# Altium PCB 8266WROOM.PcbDoc
Units mil, origin at the board's own origin, x right, y up, seen from the top; angles counter-clockwise.
Board outline 1653.54 x 3937.01 mil, 2 copper layers (Top Layer, Bottom Layer), stack 10.477 mil thick; 64 components, 32 nets, 296 pads, 36 vias.
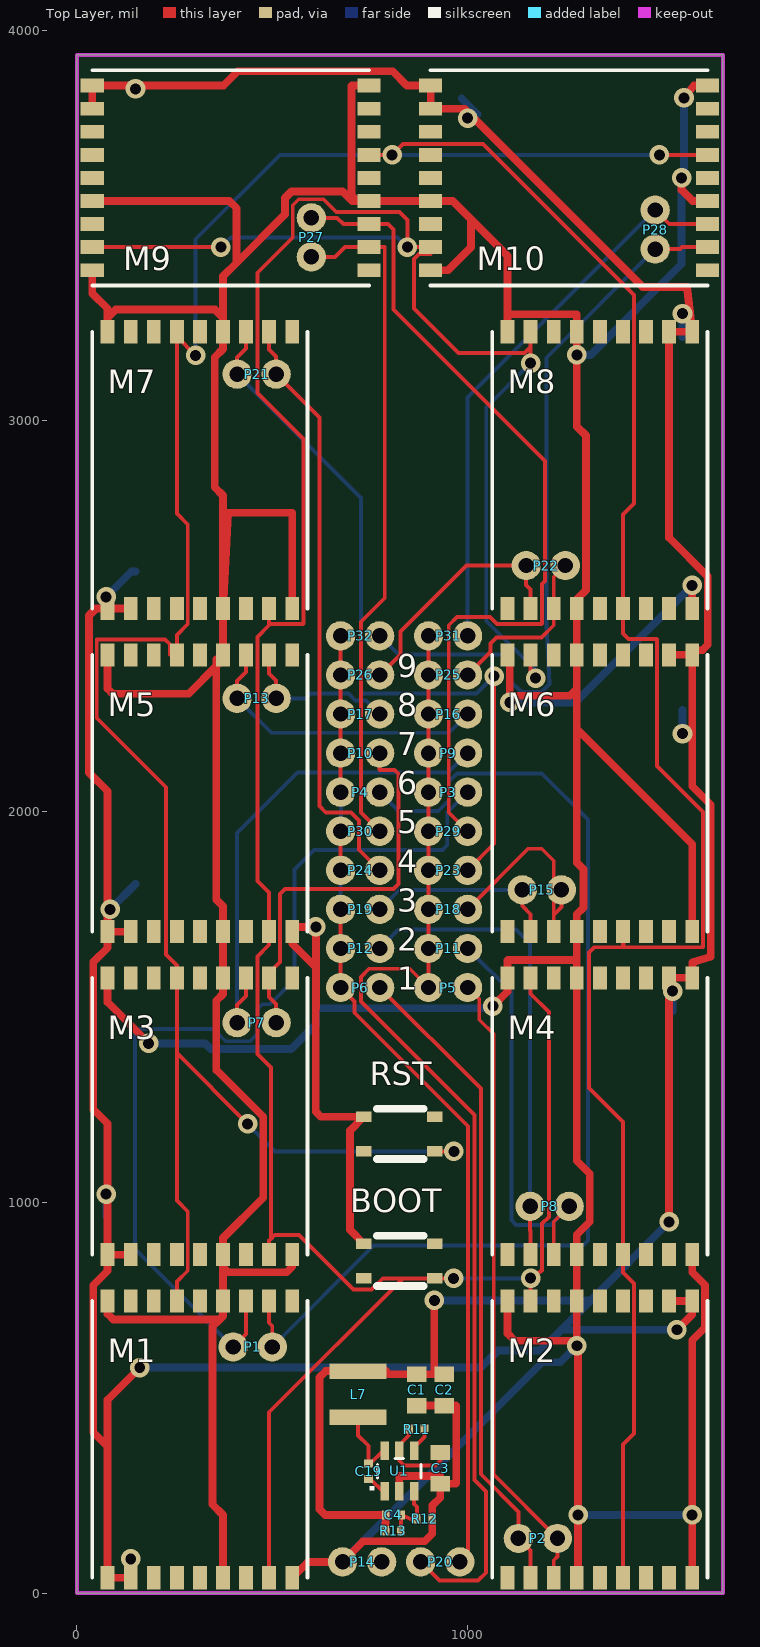
[diagram p0: Top Layer view]
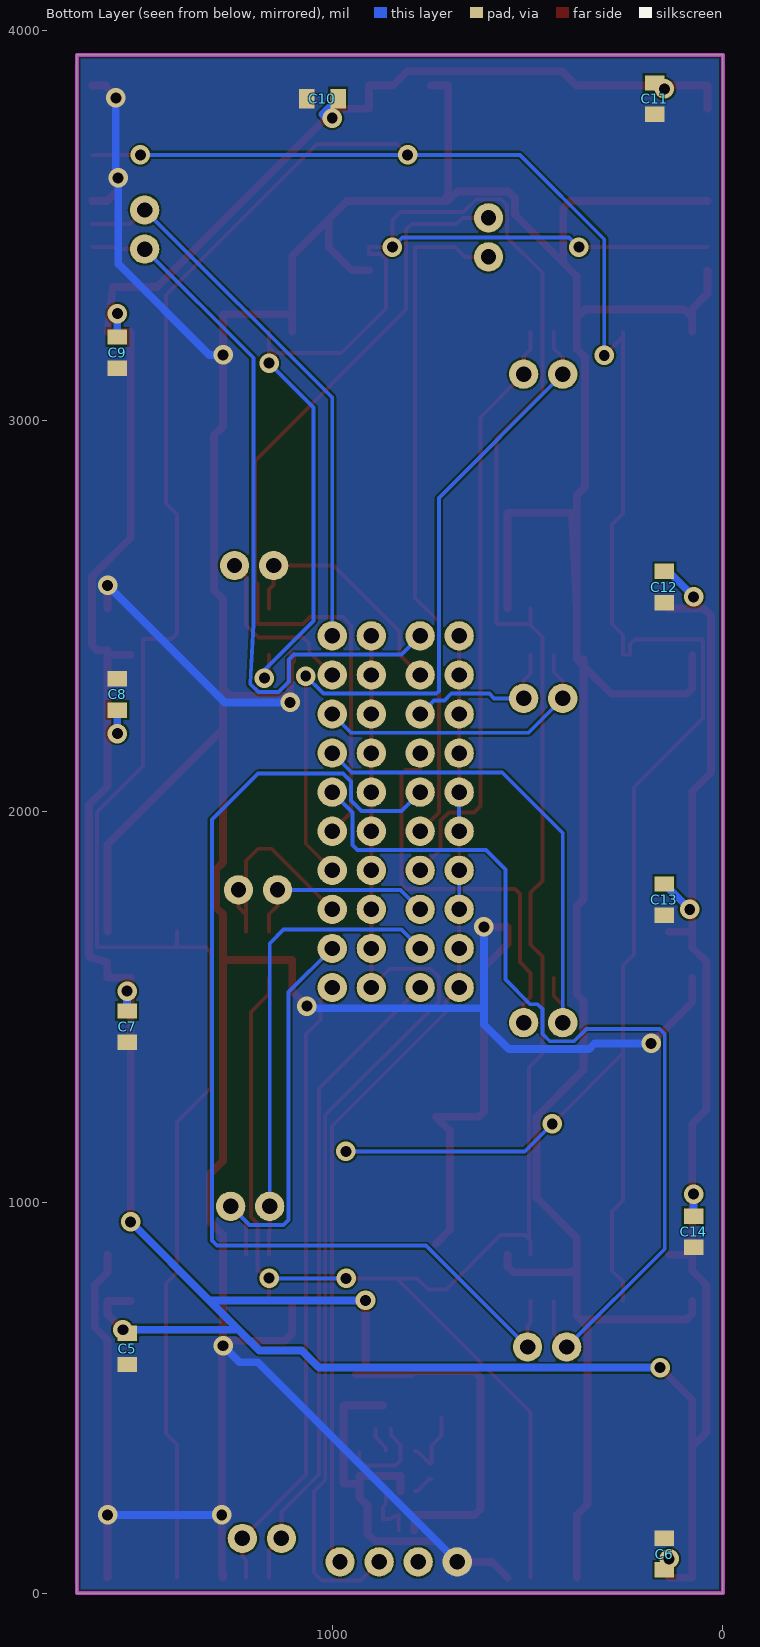
[diagram p1: Bottom Layer view, seen from below]

## Layer stack, top to bottom
Top Solder: solder mask 0.4, Solder Resist, Dk 3.5
Top Layer: signal copper 1.4
Dielectric1: core 7.6772, FR-4, Dk 4.2
Bottom Layer: signal copper 1.4
Bottom Solder: solder mask 0.4, Solder Resist, Dk 3.5

## Board outline
0,0 1653.54,0 1653.54,3937.01 0,3937.01

## Design rules (kind name [scope] priority, off if disabled: settings)
Clearance Clearance_1 [InNetClass('50R') vs InPolygon] p1: gap=20
Clearance [All] p2: gap=5
DiffPairsRouting [All] p1: maxlimit=10 minlimit=6 mostfreqgap=6 toplayer_minwidth=6 toplayer_maxwidth=15 toplayer_prefwidth=6 bottomlayer_minwidth=6 bottomlayer_maxwidth=15 bottomlayer_prefwidth=6 maxuncoupledlength=500
MinimumSolderMaskSliver [All] p1 off: minsoldermaskwidth=10
PlaneClearance [All] p1: clearance=6
PlaneConnect [All] p1: planeconnectstyle=Direct reliefexpansion=20 reliefentries=4 reliefconductorwidth=10 reliefairgap=10
PolygonConnect [All] p1: connectstyle=Direct reliefconductorwidth=10 reliefentries=4 polygonreliefangle="90 Angle" airgapwidth=10
RoomDefinition 8266WROOM [InComponentClass('8266WROOM')] p1 off: confinementstyle=ConfineIn formatcopy=TRUE lockcomponents=FALSE outline 1996.85,62.1 8636.85,62.1 8636.85,962.1 1996.85,962.1
RoomDefinition power [InComponentClass('power')] p2 off: confinementstyle=ConfineIn formatcopy=TRUE lockcomponents=FALSE outline 1313.85,-244.9 4703.85,-244.9 4703.85,-66.9 1313.85,-66.9
RoutingVias [All] p1: holewidth=28 width=50 viastyle="Through Hole" minholewidth=12 minwidth=20 maxholewidth=28 maxwidth=50
SilkToSilkClearance [All] p1 off: silktosilkclearance=10
SilkToSolderMaskClearance [IsPad] p1 off: minsilkscreentomaskgap=10 clearancetoexposedcopper=TRUE
SolderMaskExpansion [All] p1 off: expansion=4
UnpouredPolygon [All] p1: allowunpoured=FALSE
Width Width_1 [InNet('3.3') or InNet('GND')] p1: maxlimit=20 minlimit=20 preferedwidth=20
Width [All] p2: maxlimit=100 minlimit=6 preferedwidth=10
23 further rules are at their usual default settings.

## Classes and differential pairs
component class 8266WROOM: BOOT M1 M2 M3 M4 M5 M6 M7 M8 M9 M10 P1 P2 P3 P4 P5 P6 P7 P8 P9 P10 P11 P12 P13 P14 P15 P16 P17 P18 P19 P20 P21 P22 P23 P24 P25 P26 P27 P28 P29 P30 P31 P32 RST
component class power: C1 C2 C3 C4 C5 C6 C7 C8 C9 C10 C11 C12 C13 C14 C19 L7 R11 R12 R13 U1

## Components (designator, comment, footprint, x,y, rotation, side; value= is the part's Value field where it differs from the comment)
BOOT "SW-PB" SW3x4 825,850 r180 top
C1 "Cap" 0805 870,520 r90 top
C2 "Cap" 0805 940,520 r90 top
C3 "Cap" 0805 930,320 r90 top
C4 "Cap" 0402 810,200 r0 top
C5 "Cap" 0805 1525,625 r90 bottom
C6 "Cap" 0805 150,100 r270 bottom
C7 "Cap" 0805 1525,1450 r90 bottom
C8 "Cap" 0805 1550,2300 r270 bottom
C9 "Cap" 0805 1550,3175 r90 bottom
C10 "Cap" 0805 1025,3825 r180 bottom
C11 "Cap" 0805 175,3825 r90 bottom
C12 "Cap" 0805 150,2575 r90 bottom
C13 "Cap" 0805 150,1775 r90 bottom
C14 "Cap" 0805 75,925 r90 bottom
C19 "0.1uF" 0402 746.38,312.2 r270 top
L7 "4.7uH" L4015 720,450 r90 top
M1 "ESP8266_WROOM02" ESP8266-WROOM-02 314.96,393.7 r90 top
M2 "ESP8266_WROOM02" ESP8266-WROOM-02 1338.58,393.7 r270 top
M3 "ESP8266_WROOM02" ESP8266-WROOM-02 314.96,1220.47 r90 top
M4 "ESP8266_WROOM02" ESP8266-WROOM-02 1338.58,1220.47 r270 top
M5 "ESP8266_WROOM02" ESP8266-WROOM-02 314.96,2047.24 r90 top
M6 "ESP8266_WROOM02" ESP8266-WROOM-02 1338.58,2047.24 r270 top
M7 "ESP8266_WROOM02" ESP8266-WROOM-02 314.96,2874.02 r90 top
M8 "ESP8266_WROOM02" ESP8266-WROOM-02 1338.58,2874.02 r270 top
M9 "ESP8266_WROOM02" ESP8266-WROOM-02 393.7,3622.05 r0 top
M10 "ESP8266_WROOM02" ESP8266-WROOM-02 1259.84,3622.05 r0 top
P1 "2P" 2P 400,630 r0 top
P2 "2P" 2P 1230,140 r180 top
P3 "2P" 2P 900,2050 r0 top
P4 "2P" 2P 675,2050 r0 top
P5 "2P" 2P 900,1550 r0 top
P6 "2P" 2P 675,1550 r0 top
P7 "2P" 2P 410,1460 r0 top
P8 "2P" 2P 1260,990 r180 top
P9 "2P" 2P 900,2150 r0 top
P10 "2P" 2P 675,2150 r0 top
P11 "2P" 2P 900,1650 r0 top
P12 "2P" 2P 675,1650 r0 top
P13 "2P" 2P 410,2290 r0 top
P14 "2P" 2P 680,80 r0 top
P15 "2P" 2P 1240,1800 r180 top
P16 "2P" 2P 900,2250 r0 top
P17 "2P" 2P 675,2250 r0 top
P18 "2P" 2P 900,1750 r0 top
P19 "2P" 2P 675,1750 r0 top
P20 "2P" 2P 980,80 r180 top
P21 "2P" 2P 410,3120 r0 top
P22 "2P" 2P 1250,2630 r180 top
P23 "2P" 2P 900,1850 r0 top
P24 "2P" 2P 675,1850 r0 top
P25 "2P" 2P 900,2350 r0 top
P26 "2P" 2P 675,2350 r0 top
P27 "2P" 2P 600,3520 r270 top
P28 "2P" 2P 1480,3540 r270 top
P29 "2P" 2P 900,1950 r0 top
P30 "2P" 2P 675,1950 r0 top
P31 "2P" 2P 900,2450 r0 top
P32 "2P" 2P 675,2450 r0 top
R11 "10k" 0402 870,420 r180 top
R12 "10k" 0402 890,190 r180 top
R13 "45k" 0402 810,160 r180 top
RST "SW-PB" SW3x4 825,1175 r180 top
U1 "RT7295A" SOT23-6 825.12,312.2 r0 top

## Footprints (in the part's own frame and the unit in brackets; to place one, negate y for a bottom-side part, rotate by r counter-clockwise, add the part's x,y. Pads: shape width x height; smd on the part's side, far side on the other; paste and mask are expansions set on the pad)
2P [mm]
  round 1.905 hole 1: 1(0,0) 2(2.54,0)
0402 [mil] "0402-RES"
  rect 20x24 smd: 1(-19.69,0) 2(20,0)
0805 [mil]
  rect 39.37x50 smd: 1(-40,0) 2(40,0)
  body extent -50,-30 50,30, height 31
ESP8266-WROOM-02 [mm]
  rect 1.5x0.9 smd: 1(-9,6) 2(-9,4.5) 3(-9,3) 4(-9,1.5) 5(-9,0) 6(-9,-1.5) 7(-9,-3) 8(-9,-4.5) 9(-9,-6) 10(9,-6) 11(9,-4.5) 12(9,-3) 13(9,-1.5) 14(9,0) 15(9,1.5) 16(9,3) 17(9,4.5) 18(9,6)
  silkscreen extent -9,-7 9,7
L4015 [mm]
  rect 1x3.7 smd: 1(0,0) 2(3,0)
SOT23-6 [mil] "SOT23-5"
  rect 22x48 smd: 1(-37.4,-51.18) 2(0,-51.18) 3(38,-51.18) 4(38,52) 5(0,52.01) 6(-37.4,52)
  silkscreen extent -76,-50 56,32
SW3x4 [mm]
  rect 1x0.7 smd: 1(-2.3,1.125) 2(2.3,-1.125) 3(2.3,1.125) 4(-2.3,-1.125)
  silkscreen extent -1.58,-1.65 1.45,1.62, body extent -2,-1.5 2,1.5, height 2.6

## Part data
BOOT RST: "Switch"
C1 C2 C3 C4 C5 C6 C7 C8 C9 C10 C11 C12 C13 C14: "Capacitor"
C19: library part Cap, "Capacitor"
L7: library part Inductor, "Inductor"
R11 R12 R13: library part Res2, "Resistor"

## Via types
v1: diameter 50, hole 28, Top Layer to Bottom Layer, 36 vias

## Nets (pads, with @x,y where several pads share a name; then routed paths per layer and width w, separated by ;. In a path a pad name is that pad's centre, name@x,y a point inside that pad or via, vN(x,y) a via of type N, cw(c..) or ccw(c..) an arc to the next point about the centre after c; other vN are vias at no path point)
3.3: C1.2 C2.2 C4.1 C5.2 C6.2 C7.2 C8.2 C9.2 C10.2 C11.2 C12.2 C13.2 C14.2 L7.2 M1.1 M1.2 M2.1 M2.2 M3.1 M3.2 M4.1 M4.2 M5.1 M5.2 M6.1 M6.2 M7.1 M7.2 M8.1 M8.2 M9.1 M9.2 M10.1 M10.2 R13.2 | length 11685.9
  Top Layer w20: M9.2 M9.1 375.02,3858.27 411.85,3895.1 808.02,3895.1 844.85,3858.27 M10.1 M10.2 992.24,3799.21 1448.35,3343.1 1561.85,3343.1 1569.29,3277.18 M8.1 M8.2 1515.75,2701.2 1614.85,2602.1 1614.85,2427.1 1600.85,2413.1 1574.8,2413.1 M6.1 ; v1(137.79,87.79) M1.2 M1.1 78.74,375.1 ; M3.2 M3.1 ; M5.2 M5.1 ; M7.2 M7.1 78.74,2520.1 48.85,2520.1 30.85,2502.1 30.85,2099.99 78.74,2052.1 M5.1 ; v1(160.85,577.1) 78.74,494.99 78.74,375.1 ; R13.2 790,179.1 790.31,179.42 C4.1 635.45,200 620.85,214.6 620.85,552.11 636.85,568.11 L7.2 790.85,568.11 798.96,560 C1.2 914.85,560 ; v1(914.85,749.1) 914.85,560 ; C2.2 914.85,560 ; M2.2 M2.1 1574.8,713.1 v1(1535.8,674.1) ; M6.2 M6.1 ; v1(1515.85,950.1) 1515.75,950.2 M4.2 M4.1 1575.8,1614.1 1622.52,1629.02 1622.52,2017.43 1574.8,2065.15 M6.1 ; 78.74,375.1 41.85,411.99 41.85,788.1 78.74,824.99 M3.1 ; M3.1 78.74,1201.21 41.85,1238.1 41.85,1615.21 78.74,1652.1 M5.1
  Bottom Layer w20: C14.2 v1(75,1021.26) ; v1(75,2550) 140,2615 C12.2 ; v1(85,1750) C13.2 ; v1(160.85,577.1) 1033.85,577.1 1077.85,621.1 1185.85,621.1 ; v1(914.85,749.1) 1314.85,749.1 ; C10.2 1025,3785 1015,3775 v1(1000,3775) ; v1(1515.85,950.1) 1314.85,749.1 ; C7.2 v1(1525,1540.75) ; v1(1535.8,674.1) 1239.35,673.6 ; v1(1550,2200) C8.2 ; C9.2 v1(1550,3275) ; 1185.85,621.1 1186.85,621.1 1239.35,673.6 ; 1185.85,621.1 1239.35,673.6 ; 1239.35,673.6 1314.85,749.1
  other v1: 150,3850
5V: P14.2
GND: BOOT.2 C1.1 C2.1 C3.1 C5.1 C6.1 C7.1 C8.1 C9.1 C10.1 C11.1 C12.1 C13.1 C14.1 M1.6 M1.9 M1.13 M1.18 M2.6 M2.9 M2.13 M2.18 M3.6 M3.9 M3.13 M3.18 M4.6 M4.9 M4.13 M4.18 M5.6 M5.9 M5.13 M5.18 M6.6 M6.9 M6.13 M6.18 M7.6 M7.9 M7.13 M7.18 M8.6 M8.9 M8.13 M8.18 M9.6 M9.9 M9.13 M9.18 M10.6 M10.9 M10.13 M10.18 P14.1 R12.1 RST.2 U1.2 | length 20058.3
  Top Layer w20: M9.9 39.37,3326.47 78.74,3287.1 78.74,3264.6 ; M9.6 389.96,3562.99 408.85,3544.1 408.85,3405.1 ; M1.18 78.74,714.6 93.24,700.1 364.85,700.1 ; M3.18 78.74,1512.21 v1(183.85,1407.1) ; M5.18 78.74,2314.6 91.24,2302.1 286.02,2302.1 M5.13@356.85,2372.94 ; M7.18 78.74,3264.6 ; M1.6 374.02,200.1 346.85,227.27 346.85,682.1 364.85,700.1 ; M1.9 591.81,80 P14.1 732.64,132.64 890.22,132.64 909.68,152.1 R12.1 909.68,224.1 930,244.42 C3.1 ; M3.9 551.18,835.43 536.85,821.1 386.85,821.1 374.02,833.94 ; M7.9 551.18,2764.6 386.85,2765.27 M7.6 ; 611.85,1497.1 611.85,1692.6 v1@599.35,1705.1 ; v1(611.85,1705.1) v1@599.35,1705.1 ; BOOT.2 698.85,929.89 698.85,1183.69 RST.2 624.35,1219.29 611.16,1232.48 611.16,1602.12 551.18,1662.1 M5.9 551.18,1705.1 v1@599.35,1705.1 ; M9.18 703.85,3858.27 702.85,3857.27 702.85,3577.1 716.96,3562.99 ; U1.2 825.12,299.1 826.12,300.1 930,300.1 C3.1 ; C1.1 C2.1 969.85,480 970.85,479 970.85,281 969.85,280 C3.1 ; M10.9 949.85,3385.83 1008.85,3444.83 1008.85,3515.99 ; v1(1064.86,1502.6) 1102.36,1540.1 M4.9 1102.36,1619.1 1103.36,1620.1 1278.53,1620.1 1279.53,1619.1 ; M2.9 1102.36,664.6 1120.86,646.1 v1@1279.53,646.1 ; M6.9 1102.36,2387.09 1107.85,2387.09 v1(1107.85,2279.55) 1125.08,2296.78 1261.85,2296.78 1279.53,2314.46 ; M8.9 1102.36,3272.1 ; M2.13 1279.53,51.1 1282.85,51.1 v1(1282.85,200.1) 1282.85,629.85 v1(1279.53,633.18) v1@1279.53,646.1 ; v1@1553.85,3628.1 v1(1547.85,3622.1) 1547.85,3591.1 1575.96,3562.99 M10.13 ; v1(1553.85,3827.1) 1579.85,3858.27 M10.18 ; M2.18 v1(1574.8,200.1) 1574.8,647.05 1607.85,680.1 1607.85,788.05 1574.8,821.1 M4.18 ; M6.18 1574.8,1916.83 1279.53,2212.1 ; M8.18 v1(1574.8,2579.1) ; 78.74,3264.6 99.24,3285.1 353.52,3285.1 374.02,3264.6 ; M5.13@356.85,2372.94 M5.13@374.02,2390.1 ; M5.13@356.85,2372.94 356.85,2390.1 M5.13@374.02,2390.1 ; M5.13@356.85,2372.94 356.85,1775.27 374.02,1758.1 M5.6 M3.13 374.02,1533.27 356.85,1516.1 356.85,1339.1 476.85,1219.1 476.85,1011.94 374.02,909.1 M3.6 374.02,833.94 ; 364.85,700.1 374.02,709.27 M1.13 374.02,833.94 ; M5.13@374.02,2390.1 M5.13 M7.6 ; M7.6 374.02,2809.1 352.85,2830.27 352.85,3163.1 374.02,3184.27 M7.13 374.02,3264.6 ; 374.02,3264.6 374.02,3370.27 408.85,3405.1 ; 408.85,3405.1 532.5,3528.75 532.5,3570.65 549.35,3587.5 680.11,3587.5 704.61,3562.99 716.96,3562.99 ; 716.96,3562.99 M9.13 M10.6 961.85,3562.99 1008.85,3515.99 ; 1008.85,3515.99 1102.36,3422.48 1102.36,3272.1 ; 1102.36,3272.1 1103.36,3273.1 1278.53,3273.1 1279.53,3272.1 M8.6 v1(1279.53,3169.1) 1279.53,2986.1 1302.85,2962.78 1302.85,2567.1 1279.53,2543.78 M8.13 M6.6 1279.53,2314.46 ; v1@1279.53,646.1 1279.53,663.78 M2.6 M4.13 1279.53,917.1 1312.85,950.42 1312.85,1073.1 1279.53,1106.42 M4.6 1279.53,1619.1 ; 1279.53,1619.1 M6.13 1279.53,1737.1 1296.85,1754.42 1296.85,1852.76 1279.53,1870.09 1279.53,2212.1 ; 1279.53,2212.1 1279.53,2314.46
  Bottom Layer w20: v1(183.85,1407.1) 327.9,1407.1 342.5,1392.5 548.25,1392.5 611.85,1456.1 611.85,1497.1 ; v1(611.85,1705.1) 611.85,1497.1 ; P14.1 1190.9,590.9 1237.25,590.9 v1(1279.53,633.18) ; v1(1064.86,1502.6) 1058.35,1502.6 1052.85,1497.1 611.85,1497.1 ; v1(1107.85,2279.55) 1275.25,2279.55 v1(1574.8,2579.1) ; v1(1279.53,3169.1) 1314.85,3169.1 1547.85,3402.1 v1(1547.85,3622.1) ; v1(1282.85,200.1) v1(1574.8,200.1) ; v1@1553.85,3628.1 v1(1553.85,3827.1)
IO0: BOOT.1 M1.8 M2.8 M3.8 M4.8 M5.8 M6.8 M7.8 M8.8 M9.8 M10.8 | length 8348.2
  Top Layer w10: M9.8 v1(368.63,3444.88) ; M1.8 492.13,462.98 834.85,805.71 ; M3.8 492.13,902.1 496.85,906.83 ; M7.8 492.13,2481.1 ; v1(845.98,3444.88) v1@861.85,3444.88 ; v1(964.46,805.71) BOOT.1 834.85,805.71 ; M2.8 v1(1161.42,806.1) 1190.85,826.1 1190.85,946.1 1207.85,963.1 1207.85,1487.67 1161.42,1534.1 M4.8 ; M6.8 1161.42,2354.54 v1(1173.85,2342.1) ; v1(1161.42,3148.1) 1161.42,3189.6 ; M8.8 1161.42,3189.6 ; 492.13,2481.1 492.13,2477.1 461.85,2446.83 461.85,1823.1 492.13,1792.83 M5.8 492.13,1659.38 461.85,1629.1 461.85,1380.1 496.85,1345.1 496.85,906.83 ; 492.13,2481.1 493.13,2480.1 578.85,2480.1 579.85,2481.1 579.85,2954.1 461.85,3072.1 461.85,3379.45 552.5,3470.1 552.5,3552.1 567.9,3567.5 631.45,3567.5 663.85,3535.1 825.35,3535.1 845.98,3514.47 845.98,3460.75 v1@861.85,3444.88 ; 496.85,906.83 506.4,916.38 568.97,916.38 708.24,777.1 754.24,777.1 782.85,805.71 834.85,805.71 ; v1@861.85,3444.88 M10.8 905.51,3427.1 875.35,3427.1 862.85,3414.6 862.85,3288.1 976.85,3174.1 1145.92,3174.1 1161.42,3189.6
  Bottom Layer w10: v1(368.63,3444.88) 393.85,3470.1 820.76,3470.1 v1(845.98,3444.88) ; v1(964.46,805.71) 1161.02,805.71 v1(1161.42,806.1) ; v1(1161.42,3148.1) 1047.85,3034.54 1047.85,2488.37 1173.85,2362.37 v1(1173.85,2342.1)
NetC3_2: C3.2 R11.2 U1.5 | length 228
  Top Layer w10: R11.2 850,403.98 825.12,379.1 U1.5 825.12,339.6 837.62,327.1 918.35,327.1 930.85,339.6 930.85,360 C3.2
NetC4_2: C4.2 R12.2 R13.1 U1.3 | length 156
  Top Layer w10: R13.1 829.68,179.1 830,179.42 C4.2 853.75,190 R12.2 870,221.1 863.12,227.98 U1.3
NetC19_1: C19.1 L7.1 U1.6 | length 183.8
  Top Layer w10: L7.1 720,403.48 746.38,377.1 C19.1 750.85,331.89 783.16,364.2 U1.6
NetC19_2: C19.2 U1.1 | length 54.3
  Top Layer w10: C19.2 750.85,292.2 782.03,261.02 U1.1
NetR11_1: R11.1 U1.4 | length 66.8
  Top Layer w10: U1.4 863.12,372.54 889.68,399.11 R11.1
RST: M1.15 M2.15 M3.15 M4.15 M5.15 M6.15 M7.15 M8.15 M9.15 M10.15 RST.1 | length 10207.4
  Top Layer w10: M1.15 255.91,797.1 283.85,825.05 283.85,977.1 255.91,1005.05 255.91,1382.05 ; M7.15 M7.15@255.91,3216.05 ; v1(303.85,3168.1) M7.15@255.91,3216.05 ; v1(436.85,1201.1) 255.91,1382.05 ; M9.15 v1(806.85,3681.1) 834.85,3709.1 1039.4,3709.1 1425.85,3322.65 1425.85,2789.31 1397.64,2761.1 M8.15 1397.64,2456.31 1411.85,2442.1 1483.85,2442.1 1484.85,2441.1 1484.85,2117.1 1602.52,1999.43 1602.52,1654.1 1601.52,1653.1 1398.64,1653.1 1397.77,1653.97 ; RST.1 v1(964.85,1130.71) ; M2.15 1397.64,379.89 1425.85,408.1 1425.85,792.89 1397.64,821.1 M4.15 1397.64,1206.1 1310.85,1292.89 1310.85,1639.6 1323.35,1652.1 1397.77,1653.97 ; v1(1490.85,3681.1) M10.15 ; 255.91,1382.05 M3.15 255.91,1606.05 227.85,1634.1 227.85,2062.6 50.85,2239.6 50.85,2440.1 51.85,2441.1 225.35,2441.1 237.85,2428.6 237.85,2401.57 M5.15 255.91,2452.16 283.85,2480.1 283.85,2735.1 255.91,2763.05 M7.15@255.91,3216.05 ; 1397.77,1653.97 1397.64,1654.1 M6.15 1398.62,1653.99 1397.77,1653.97
  Bottom Layer w10: v1(303.85,3168.1) 303.85,3465.05 519.9,3681.1 v1(806.85,3681.1) v1(1490.85,3681.1) ; v1(436.85,1201.1) 507.24,1130.71 v1(964.85,1130.71)
RX: P3.1 P5.1 P9.1 P11.1 P16.1 P18.1 P20.2 P23.1 P25.1 P29.1 P31.1 | length 2954.3
  Top Layer w10: P20.2 927.9,32.1 1026.85,32.1 1046.85,52.1 1046.85,260.1 1017.85,289.1 1017.85,1223.6 726.85,1514.6 726.85,1577.1 747.85,1598.1 851.9,1598.1 P5.1 P11.1 P18.1 P23.1 P29.1 P3.1 P9.1 P16.1 P25.1 P31.1
RX1: M2.11 P2.2 P6.2 | length 1670.7
  Top Layer w10: P6.2 1033.85,1291.15 1033.85,304.13 1130,207.98 P2.2 1161.42,108.58 M2.11
RX2: M4.11 P8.2 P12.2 | length 1216.6
  Top Layer w10: P8.2 1160,928.52 1161.42,927.1 M4.11
  Bottom Layer w10: P12.2 823.1,1698.1 1124.35,1698.1 1160,1662.45 P8.2
RX3: M6.11 P15.2 P19.2 | length 501.7
  Top Layer w10: P15.2 1140,1758.92 1161.42,1737.5 M6.11
  Bottom Layer w10: P19.2 825,1800 P15.2
RX4: M7.11 P21.2 P24.2 | length 1533.4
  Top Layer w10: M7.11 492.13,3182.98 510,3165.1 P21.2 620.85,3009.15 620.85,2014.1 636.85,1998.1 701.5,1998.1 722.5,1977.1 722.5,1902.5 P24.2
RX5: M9.11 P27.2 P30.2 | length 1737.7
  Top Layer w10: P27.2 660.85,3420 685.73,3444.88 M9.11 786.85,3444.88 787.85,3443.88 787.85,2547.1 726.85,2486.1 726.85,1998.15 P30.2
RX6: M1.11 P1.2 P4.2 | length 2789.3
  Top Layer w10: M1.11 492.13,691.98 500,684.1 P1.2
  Bottom Layer w10: P1.2 759.6,889.6 1295.35,889.6 1307.85,902.1 1307.85,1980.1 1189.85,2098.1 972.85,2098.1 951.85,2077.1 951.85,2029.1 924.85,2002.1 822.9,2002.1 P4.2
RX7: M3.11 P7.2 P10.2 | length 1038.6
  Top Layer w10: P7.2 510,1508.1 492.13,1525.98 M3.11 492.13,1587.1 519.85,1614.83 519.85,1789.6 532.35,1802.1 810.35,1802.1 822.85,1814.6 822.85,2097.1 812.85,2107.1 776,2107.1 775,2108.1 P10.2
RX8: M5.11 P13.2 P17.2 | length 410.6
  Top Layer w10: M5.11 492.13,2353.98 510,2336.1 P13.2
  Bottom Layer w10: P13.2 585.85,2290 597.95,2302.1 695.4,2302.1 712.5,2285 740,2285 P17.2
RX9: M8.11 P22.2 P26.2 | length 640.1
  Top Layer w10: P26.2 827.85,2402.85 827.85,2461.1 996.75,2630 P22.2 1150,2580.52 1161.42,2569.1 M8.11
RX10: M10.11 P28.2 P32.2 | length 1900.7
  Top Layer w10: P28.2 1543.85,3440 1548.73,3444.88 M10.11
  Bottom Layer w10: P32.2 822.9,2402.1 1098.21,2402.1 1110.36,2389.95 1110.36,2333.59 1137.85,2306.1 1188.85,2306.1 1209.85,2327.1 1201.85,2480.1 1201.85,3161.85 P28.2
TX: P4.1 P6.1 P10.1 P12.1 P17.1 P19.1 P20.1 P24.1 P26.1 P30.1 P32.1 | length 2526.6
  Top Layer w10: P19.1 P12.1 P6.1 710.42,1514.58 710.42,1485.42 1000.85,1194.99 1000.85,102.1 980,102.1 P20.1 ; P24.1 P30.1 ; P4.1 P10.1 P17.1 P26.1 P32.1
  Bottom Layer w10: P19.1 674.85,1750.15 674.85,1849.85 P24.1 ; P30.1 675.85,1950.85 675.85,2049.15 P4.1
TX1: M2.12 P2.1 P5.2 | length 1609.8
  Top Layer w10: P5.2 1029.86,1520.14 1029.86,1467.6 1066.85,1430.61 1066.85,303.15 P2.1 1230,93.63 1220.47,84.1 M2.12
TX2: M4.12 P8.1 P11.2 | length 1055.1
  Top Layer w10: M4.12 1220.47,950.47 P8.1
  Bottom Layer w10: P11.2 1111.85,1538.15 1111.85,954.6 1124.35,942.1 1212.1,942.1 P8.1
TX3: M6.12 P15.1 P18.2 | length 551
  Top Layer w10: P18.2 1155.1,1905.1 1189.85,1905.1 1220.47,1874.48 1220.47,1736.1 ; M6.12 1220.47,1736.1 ; P15.1 1240,1755.63 1220.47,1736.1
TX4: M7.12 P21.1 P23.2 | length 1947.8
  Top Layer w10: P21.1 410,3162.1 433.07,3185.17 M7.12 ; P23.2 1067.85,1917.85 v1(1067.85,2347.1)
  Bottom Layer w10: P21.1 726.85,2803.15 726.85,2309.1 733.85,2302.1 1022.85,2302.1 v1(1067.85,2347.1)
TX5: M9.12 P27.1 P29.2 | length 2197.8
  Top Layer w10: P27.1 665.85,3520 681.91,3503.94 M9.12 796.52,3503.94 810.85,3489.6 810.85,3285.1 1197.85,2898.1 1197.85,2590.1 1190.85,2583.1 1190.85,2481.1 1189.85,2480.1 1074.85,2480.1 1056.85,2498.1 972.85,2498.1 951.85,2477.1 951.85,1998.15 P29.2
TX6: M1.12 P1.1 P3.2 | length 2421.7
  Top Layer w10: P1.1 433.07,663.07 M1.12
  Bottom Layer w10: P1.1 148.85,881.15 148.85,1431.1 161.85,1444.1 349.35,1444.1 380.95,1412.5 443.25,1412.5 461.85,1431.1 461.85,1494.6 474.35,1507.1 493.85,1507.1 556.85,1570.1 556.85,1852.1 606.85,1902.1 935.35,1902.1 947.85,1914.6 947.85,1997.85 P3.2
TX7: M3.12 P7.1 P9.2 | length 1284.4
  Top Layer w10: P7.1 410,1505.1 433.07,1528.17 M3.12
  Bottom Layer w10: P7.1 410,1945.25 564.85,2100.1 950.1,2100.1 P9.2
TX8: M5.12 P13.1 P16.2 | length 767.4
  Top Layer w10: P13.1 410,2334.1 433.07,2357.17 M5.12
  Bottom Layer w10: P13.1 497.9,2202.1 952.1,2202.1 P16.2
TX9: M8.12 P22.1 P25.2 | length 450.7
  Top Layer w10: P25.2 1058.85,2408.85 1058.85,2430.1 1074.35,2445.6 1188.97,2445.6 1220.47,2477.1 M8.12 1220.47,2600.47 P22.1
TX10: M10.12 P28.1 P31.2 | length 1437.9
  Top Layer w10: P28.1 1516.06,3503.94 M10.12
  Bottom Layer w10: P31.2 1000,3060 P28.1
pads on no net: BOOT.3 BOOT.4 M1.3 M1.4 M1.5 M1.7 M1.10 M1.14 M1.16 M1.17 M2.3 M2.4 M2.5 M2.7 M2.10 M2.14 M2.16 M2.17 M3.3 M3.4 M3.5 M3.7 M3.10 M3.14 M3.16 M3.17 M4.3 M4.4 M4.5 M4.7 M4.10 M4.14 M4.16 M4.17 M5.3 M5.4 M5.5 M5.7 M5.10 M5.14 M5.16 M5.17 M6.3 M6.4 M6.5 M6.7 M6.10 M6.14 M6.16 M6.17 M7.3 M7.4 M7.5 M7.7 M7.10 M7.14 M7.16 M7.17 M8.3 M8.4 M8.5 M8.7 M8.10 M8.14 M8.16 M8.17 M9.3 M9.4 M9.5 M9.7 M9.10 M9.14 M9.16 M9.17 M10.3 M10.4 M10.5 M10.7 M10.10 M10.14 M10.16 M10.17 RST.3 RST.4

## Polygon pours and split planes (outlines as drawn)
GND on Bottom Layer "Bottom Layer-No Net" (solid, remove dead copper, pour order 2): 0,0 -25,25 -25,4050 1850,4050 1875,4025 1825,3975 1825,-125

## Keep-outs
Keep-Out Layer:
  the board outline again, w10

## Silkscreen, mask and mechanical layers (free items; w line width, h text height)
Top Overlay:
  text "9" at 820,2325 h100
  text "8" at 820,2225 h100
  text "7" at 820,2125 h100
  text "6" at 820,2025 h100
  text "5" at 820,1925 h100
  text "4" at 820,1825 h100
  text "3" at 820,1725 h100
  text "2" at 820,1625 h100
  text "1" at 820,1525 h100